# Altium PCB Main-PCB.PcbDoc
Units mm, origin at the board's own origin, x right, y up, seen from the top; angles counter-clockwise.
Board outline 38.4 x 38.83 mm, 2 copper layers (Top Layer, Bottom Layer); 33 components, 27 nets, 163 pads, 42 vias.
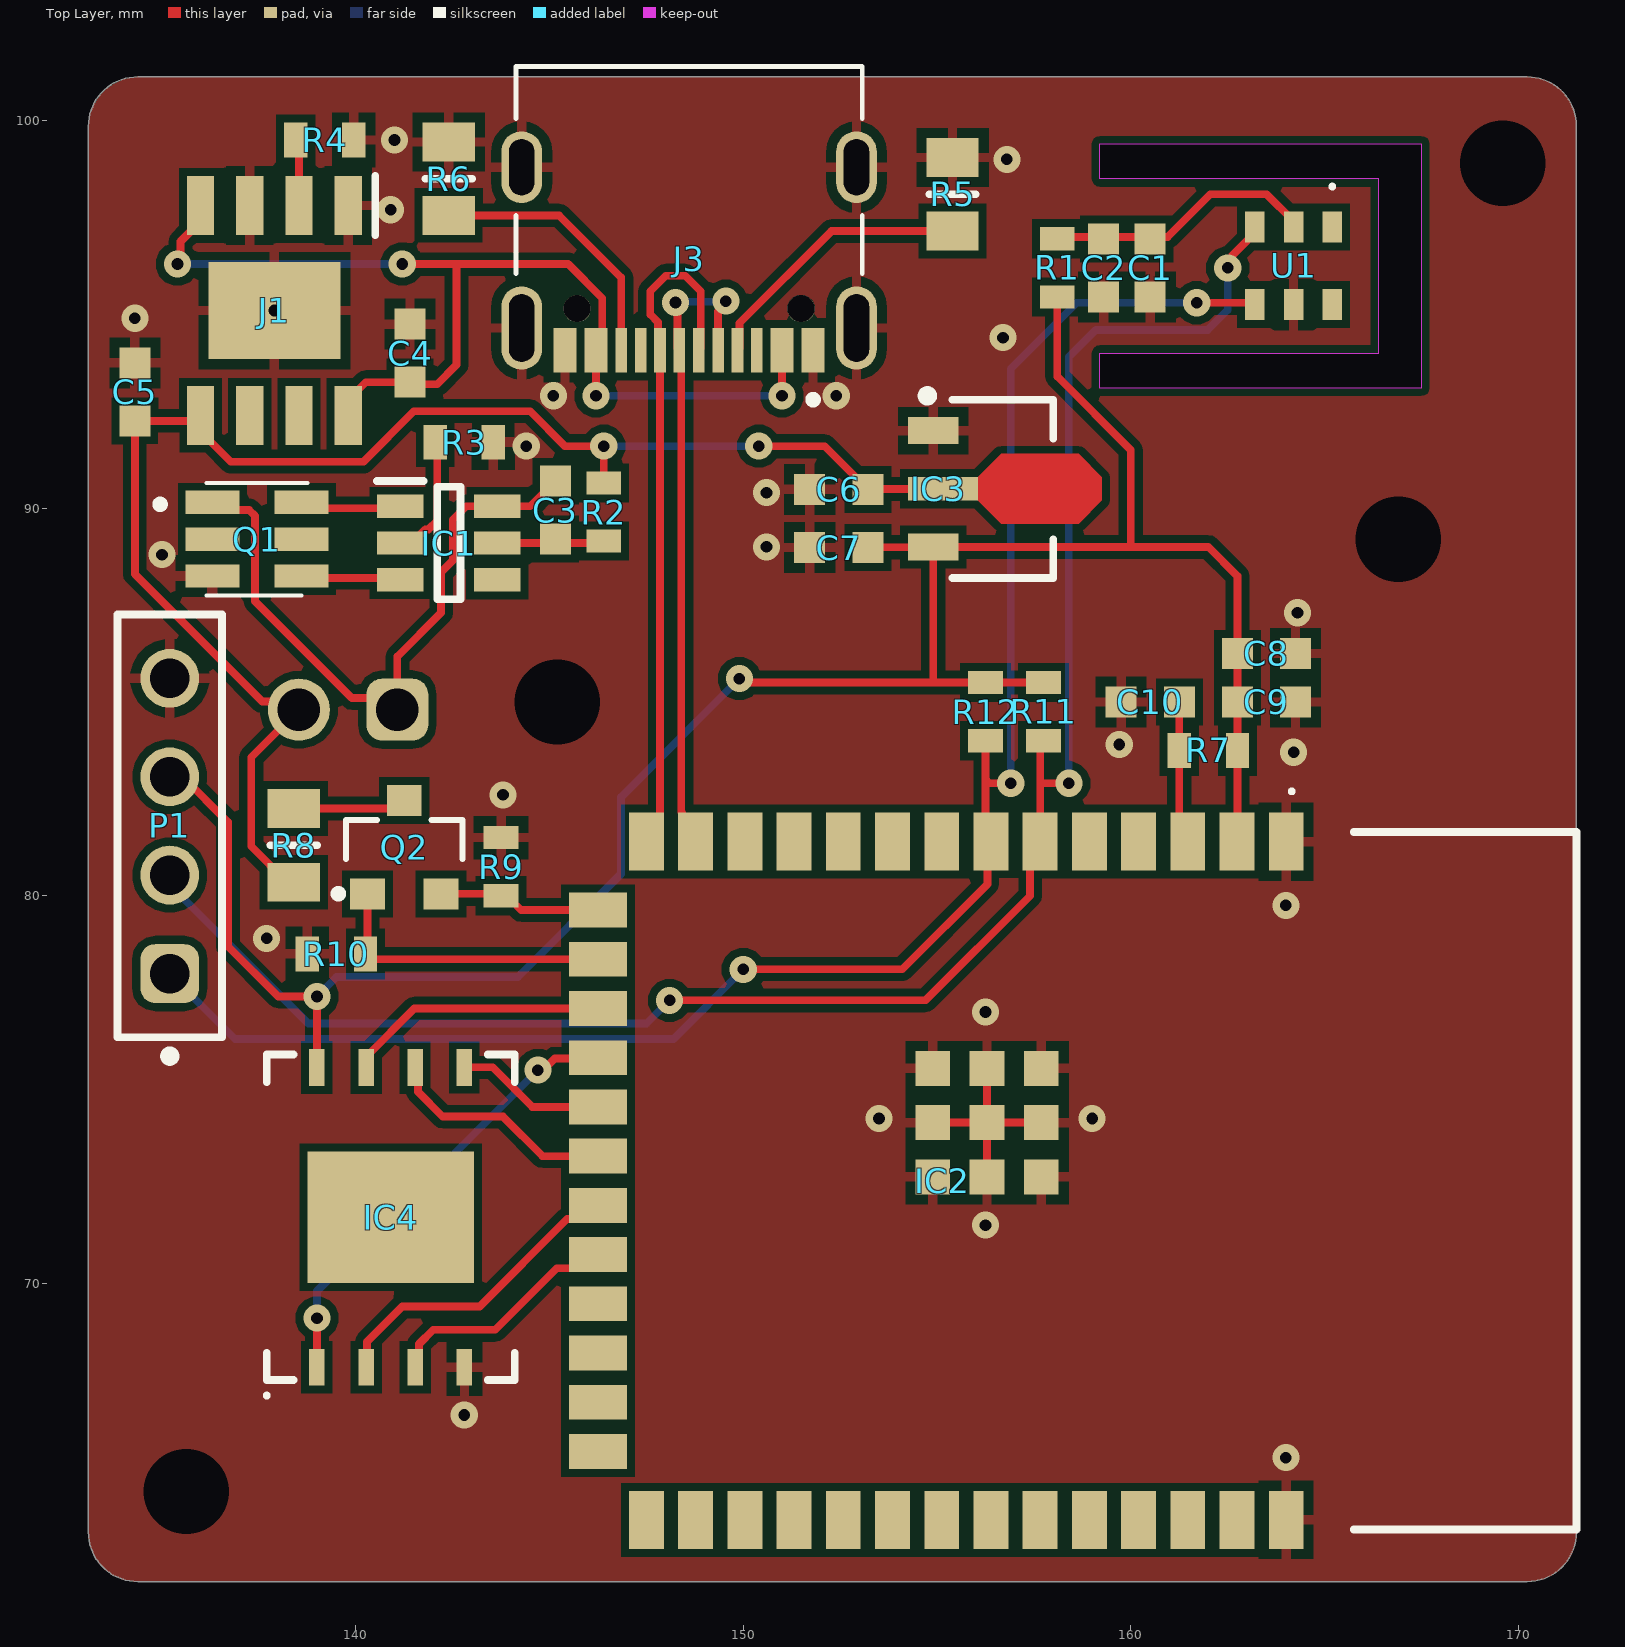
[diagram p0: Top Layer view]
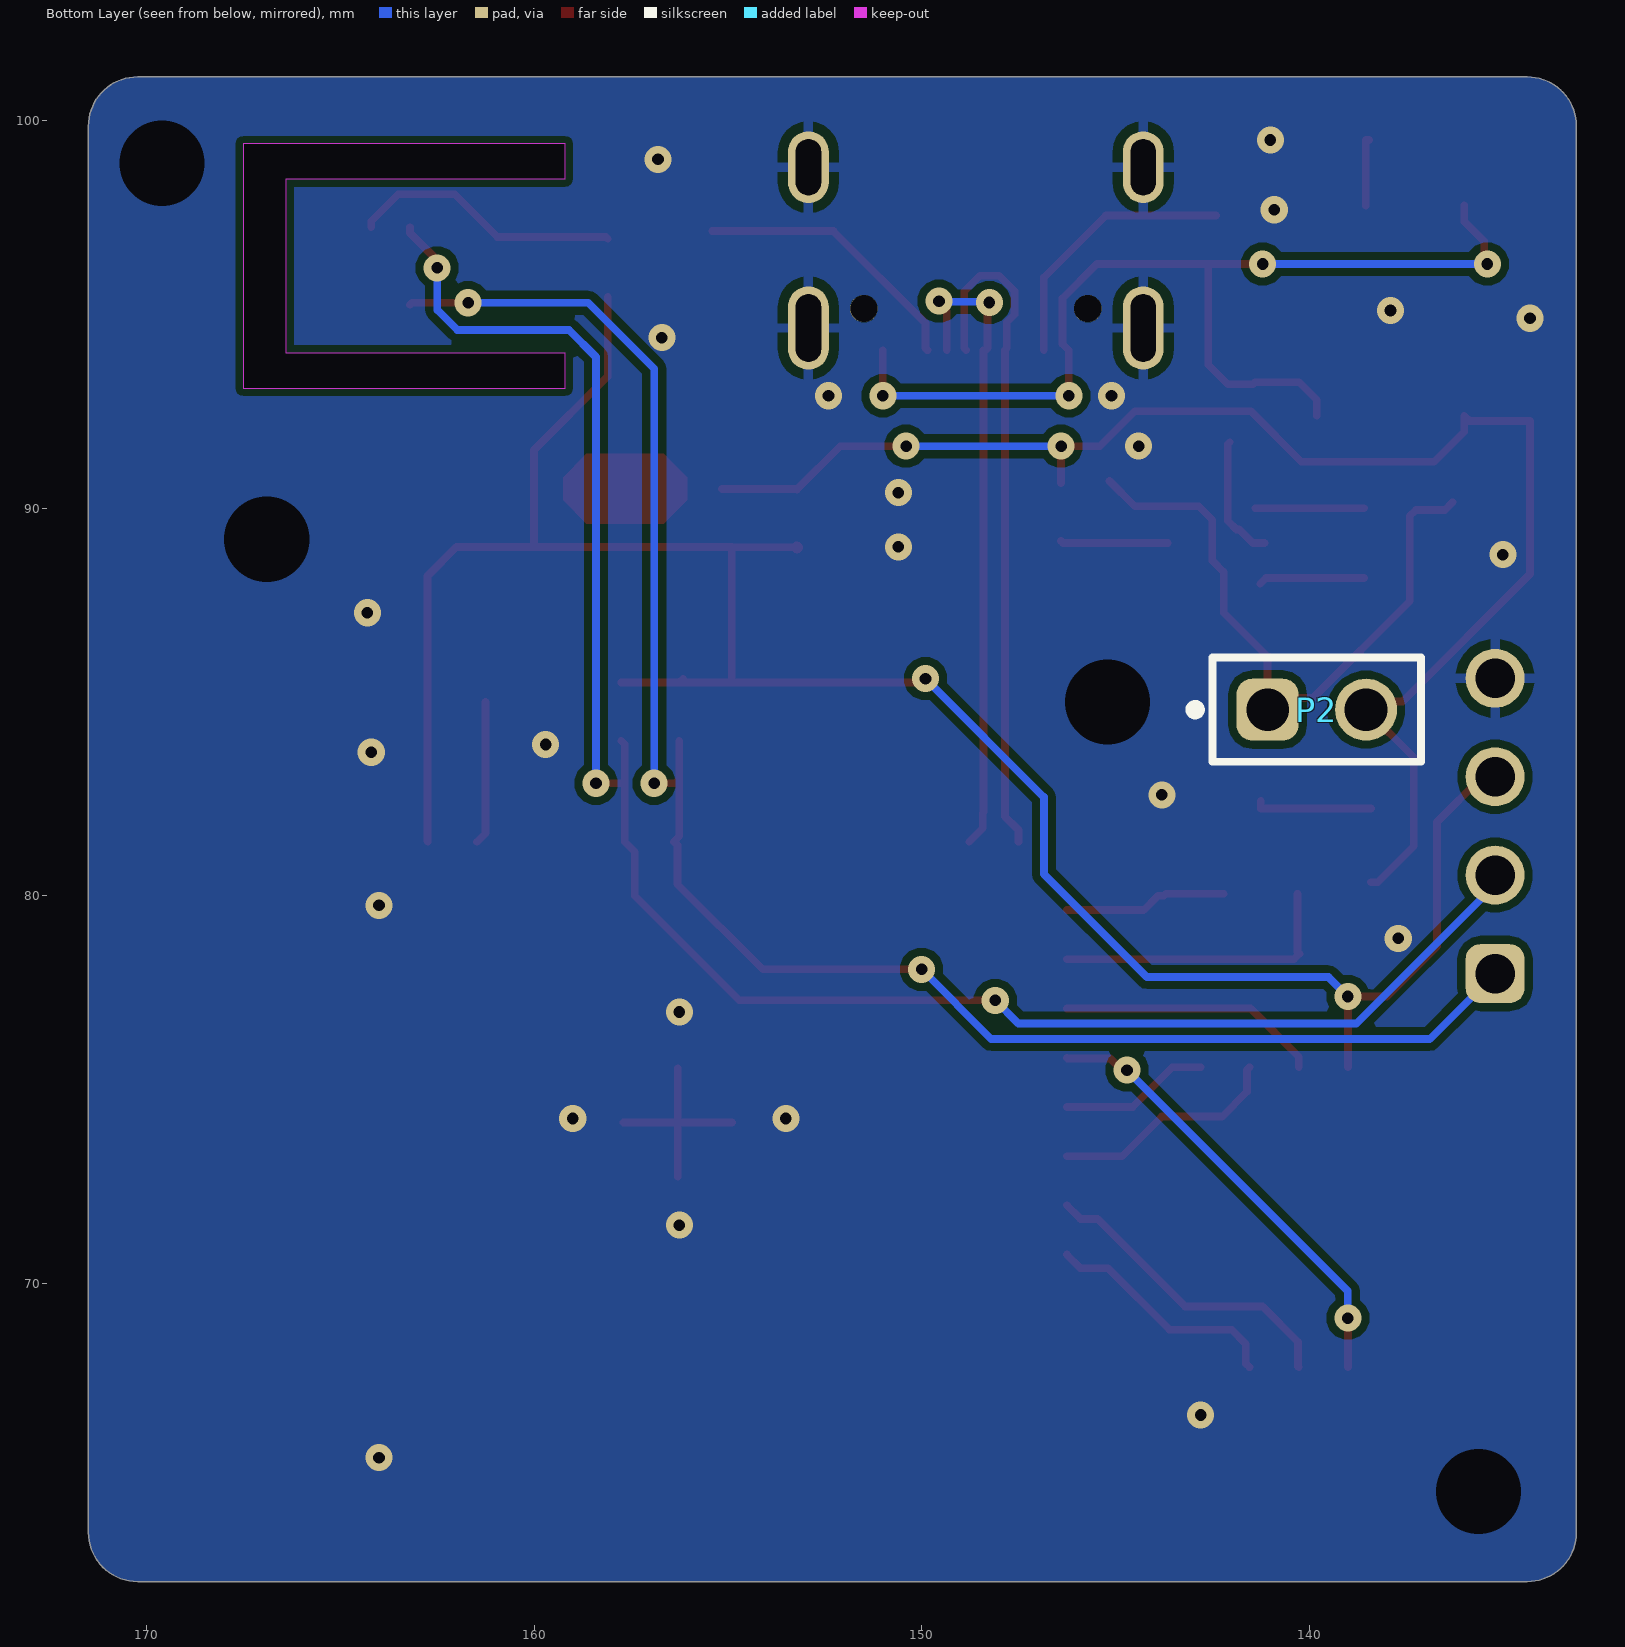
[diagram p1: Bottom Layer view, seen from below]

## Layer stack, top to bottom
Top Solder: solder mask 0.0102, Solder Resist, Dk 3.5
Top Layer: signal copper 0.0356
Dielectric 1: dielectric 0.32, FR-4, Dk 4.8
Bottom Layer: signal copper 0.0356
Bottom Solder: solder mask 0.0102, Solder Resist, Dk 3.5

## Board outline
133.1,63.57 133.1,99.86 cw(c134.37,99.86) 134.37,101.13 170.23,101.13 cw(c170.23,99.86) 171.5,99.86 171.5,99.3 171.5,65.523 171.5,63.57 cw(c170.23,63.57) 170.23,62.3 134.37,62.3 cw(c134.37,63.57)
cut-out: 159.2,94 166.4,94 166.4,98.5 159.2,98.5 159.2,99.4 167.5,99.4 167.5,93.1 159.2,93.1

## Design rules (kind name [scope] priority, off if disabled: settings)
Clearance Clearance_1 [All] p1: gap=0.2 ignorepadtopadclearanceinfootprint=TRUE except(0: Arc-Hole Track-Hole SMDPad-Hole THPad-Hole Via-Hole Fill-Hole Poly-Hole Region-Hole Text-Hole Hole-Hole)
Clearance Clearance_1 [OnMid vs OnMid] p2: gap=0.254 ignorepadtopadclearanceinfootprint=FALSE sourcerule=43 cellrowname=All cellrowtype=0 cellcolname=All cellcoltype=0 innerlayers=TRUE
Clearance Clearance_2 [(ExistsOnLayer('Top Layer') Or ExistsOnLayer('Bottom Layer')) vs (ExistsOnLayer('Top Layer') Or ExistsOnLayer('Bottom Layer'))] p3: gap=0.254 ignorepadtopadclearanceinfootprint=FALSE sourcerule=43 cellrowname=All cellrowtype=0 cellcolname=All cellcoltype=0 outerlayers=TRUE
Clearance [All] p4: gap=0.254 ignorepadtopadclearanceinfootprint=FALSE ismatrix=TRUE
MinimumSolderMaskSliver [All] p1: minsoldermaskwidth=0.05
PolygonConnect PolygonConnectStyle_1 [IsVia] p1: connectstyle=Direct reliefconductorwidth=0.254 reliefentries=2 polygonreliefangle="0 Angle" airgapwidth=0.254
PolygonConnect [All] p2: connectstyle=Relief reliefconductorwidth=0.254 reliefentries=4 polygonreliefangle="90 Angle" airgapwidth=0.254
RoutingVias RoutingViaStyle_1 [All] p1: holewidth=0.3 width=0.7 viastyle="Through Hole" minholewidth=0.3 minwidth=0.7 maxholewidth=0.711 maxwidth=1.27
SilkToSilkClearance [All] p1: silktosilkclearance=0.15
SilkToSolderMaskClearance [IsPad] p1: minsilkscreentomaskgap=0.1 clearancetoexposedcopper=TRUE
SolderMaskExpansion SolderMaskExpansion_1 [IsVia] p1: expansion=0.102 istentingtop=TRUE useseparateexpansions=TRUE expansionbottom=0.102 istentingbottom=TRUE
SolderMaskExpansion [All] p2: expansion=0.1 istentingtop=FALSE
SupplyNets "Schematic Supply Nets_3" [InNet('+3V')] p1: voltage=0.000
SupplyNets "Schematic Supply Nets_2" [InNet('B+')] p2: voltage=0.000
SupplyNets "Schematic Supply Nets_1" [InNet('+VBUS')] p3: voltage=0.000
SupplyNets "Schematic Supply Nets" [InNet('GND')] p4: voltage=0.000
Width MaxMinWidth_1 [All] p1: maxlimit=0.3 minlimit=0.15 preferedwidth=0.2 minimp=50.000000 maximp=50.000000 favimp=50.000000
27 further rules are at their usual default settings.

## Classes and differential pairs
component class U_USB: J3 qg R5 R6
component class U_NAND_Flash: IC4 qg
component class U_LDO: C6 C7 IC3 qg
component class U_ESP32_S2_SOLO_2: C8 C9 C10 IC2 P1 P? Q2 qg R7 R8 R9 R10
component class U_Battery_Management: C3 C4 C5 IC1 J1 P2 Q1 qg R2 R3 R4
component class U_AHT20_Sensor: C1 C2 qg R1 U1
component class Top_Design: qg R11 R12

## Components (designator, comment, footprint, x,y, rotation, side; value= is the part's Value field where it differs from the comment)
C1 "Generic Capacitor 10uF 0603" "Wurth 0603 capacitor" 160.5,96.2 r90 top value=10uF
C2 "Generic Capacitor 100nF 0603" "Wurth 0603 capacitor" 159.3,96.2 r90 top value=100nF
C3 "Generic Capacitor 100nF 0603" "Wurth 0603 capacitor" 145.15,89.95 r270 top value=100nF
C4 "Generic Capacitor 10uF 0603" "Wurth 0603 capacitor" 141.4,94 r270 top value=10uF
C5 "Generic Capacitor 10uF 0603" "Wurth 0603 capacitor" 134.3,93 r270 top value=10uF
C6 "Generic Capacitor 10uF 0603" "Wurth 0603 capacitor" 152.463,90.485 r0 top value=10uF
C7 "Generic Capacitor 10uF 0603" "Wurth 0603 capacitor" 152.463,88.985 r0 top value=10uF
C8 "Generic Capacitor 10uF 0603" "Wurth 0603 capacitor" 163.5,86.25 r180 top value=10uF
C9 "Generic Capacitor 100nF 0603" "Wurth 0603 capacitor" 163.5,85 r180 top value=100nF
C10 "Generic Capacitor 1uF 0603" "Wurth 0603 capacitor" 160.5,85 r0 top value=1uF
IC1 "FS312F-G" SOT95P280X145-6N 142.4,89.1 r0 top
IC2 "ESP32-S2-SOLO-2" "ESPRESSIF ESP32S2SOLO2" 158.75,72.644 r270 top
IC3 "HT7130-1" "UMW SOT89-3" 156.75,90.5 r0 top
IC4 "HYF1GQ4UDACAE" "HeYangTek WSON-8-EP" 140.9,71.7 r90 top
J1 "TP4056" SOIC127P600X175-9N 137.9,95.1 r270 top
J3 "KH-TYPE-C-16P" KINGHELM_KH-TYPE-C-16P 148.6,98.8 r180 top
P1 "OLED header" "4x1 2.54mm F" 135.2,81.8 r90 top
P2 "Battery connection" "2x1 2.54mm" 139.8,84.8 r180 bottom
Q1 "FS8205" FS8205 136.8,89.2 r0 top
Q2 "SI2310B-TP" "MCC SOT-23-3" 141.25,81.25 r90 top
R1 "Generic Resistor 330R 0603" "Wurth 0603 Resistor" 158.1,96.2 r90 top value=330R
R2 "Generic Resistor 100R 0603" "Wurth 0603 Resistor" 146.4,89.9 r90 top value=100R
R3 "Generic Resistor 1k 0603" "Wurth 0603 Resistor" 142.8,91.7 r180 top value=1k
R4 "Generic Resistor 2k 0603" "Wurth 0603 Resistor" 139.2,99.5 r180 top value=2k
R5 "Generic Resistor 5k1 0805" "0805 Resistor" 155.4,98.1 r270 top value=5k1
R6 "Generic Resistor 5k1 0805" "0805 Resistor" 142.4,98.5 r270 top value=5k1
R7 "Generic Resistor 10k 0603" "Wurth 0603 Resistor" 162,83.75 r0 top value=10k
R8 "Generic Resistor 5k1 0805" "0805 Resistor" 138.4,81.3 r270 top value=5k1
R9 "Generic Resistor 2k2 0603" "Wurth 0603 Resistor" 143.75,80.75 r270 top value=2k2
R10 "Generic Resistor 10k 0603" "Wurth 0603 Resistor" 139.5,78.5 r0 top value=10k
R11 "Generic Resistor 2k2 0603" "Wurth 0603 Resistor" 157.75,84.75 r90 top value=2k2
R12 "Generic Resistor 2k2 0603" "Wurth 0603 Resistor" 156.25,84.75 r90 top value=2k2
U1 "AHT20" AHT20 164.2,96.25 r270 top

## Footprints (in the part's own frame and the unit in brackets; to place one, negate y for a bottom-side part, rotate by r counter-clockwise, add the part's x,y. Pads: shape width x height; smd on the part's side, far side on the other; paste and mask are expansions set on the pad)
"2x1 2.54mm" [mm] "Pin Header, pitch 2.54 mm, THT, Vertical, single row, 2p"
  rrect50% 1.6x1.6 hole 1.1: 1(-1.27,0)
  round 1.6 hole 1.1: 2(1.27,0)
  silkscreen extent -3.26,-1.35 2.69,1.35, body extent -2.54,-1.27 2.54,1.27, height 8.57
"4x1 2.54mm F" [mm] "Socket Header, Pitch 2.54 mm, THT, Vertical, single row, 4p"
  rrect50% 1.52x1.52 hole 1.02: 1(-3.81,0)
  round 1.52 hole 1.02: 2(-1.27,0) 3(1.27,0) 4(3.81,0)
  silkscreen extent -6.06,-1.35 5.46,1.35, body extent -5.33,-1.25 5.33,1.25, height 8.55
"0805 Resistor" [mm]
  rect 1x1.35 smd paste-0.045 mask+0.1: 1(-0.95,0) 2(0.95,0)
  silkscreen extent 0,-0.6 0,0.6, body extent -1,-0.63 1,0.63, height 0.52
AHT20 [mm]
  rect 0.8x0.5 smd: 1(-1,1) 2(-1,0) 3(-1,-1) 4(1,-1) 5(1,0) 6(1,1)
  silkscreen extent -2.1,0.95 -2,1.05, body extent -1.5,-1.5 1.5,1.5, height 1.2
"ESPRESSIF ESP32S2SOLO2" [mm]
  rect 1.5x0.9 smd: 1(-8.75,5.26) 2(-8.75,3.99) 3(-8.75,2.72) 4(-8.75,1.45) 5(-8.75,0.18) 6(-8.75,-1.09) 7(-8.75,-2.36) 8(-8.75,-3.63) 9(-8.75,-4.9) 10(-8.75,-6.17) 11(-8.75,-7.44) 12(-8.75,-8.71) 13(-8.75,-9.98) 14(-8.75,-11.25) 27(8.75,-11.25) 28(8.75,-9.98) 29(8.75,-8.71) 30(8.75,-7.44) 31(8.75,-6.17) 32(8.75,-4.9) 33(8.75,-3.63) 34(8.75,-2.36) 35(8.75,-1.09) 36(8.75,0.18) 37(8.75,1.45) 38(8.75,2.72) 39(8.75,3.99) 40(8.75,5.26)
  rect 0.9x1.5 smd: 15(-6.985,-12.5) 16(-5.715,-12.5) 17(-4.445,-12.5) 18(-3.175,-12.5) 19(-1.905,-12.5) 20(-0.635,-12.5) 21(0.635,-12.5) 22(1.905,-12.5) 23(3.175,-12.5) 24(4.445,-12.5) 25(5.715,-12.5) 26(6.985,-12.5)
  rect 0.9x0.9 smd: 41(-1.5,-2.46) 42(-1.5,-1.06) 43(-2.9,-1.06) 44(-2.9,-2.46) 45(-2.9,-3.86) 46(-1.5,-3.86) 47(-0.1,-3.86) 48(-0.1,-2.46) 49(-0.1,-1.06)
  silkscreen extent -10.1,5.35 9,12.75, body extent -9,-12.75 9,12.75, height 3.1
FS8205 [mm]
  rect 1.4x0.6 smd: 1(-0.5,0.95) 2(-0.5,0) 3(-0.5,-0.95) 4(1.8,0.95) 5(1.8,0) 6(1.8,-0.95)
  silkscreen extent -1.95,-1.45 1.95,1.45, body extent -0.79,-1.45 2.01,1.45, height 1.46
"HeYangTek WSON-8-EP" [mm] "SON, 8-Leads, Body 6,00x8,00mm, Pitch 1,27mm, Thermal Pad 4,30x3,40mm, IPC Medium Density"
  rect 0.95x0.4 smd: 1(-3.87,1.905) 2(-3.87,0.635) 3(-3.87,-0.635) 4(-3.87,-1.905) 5(3.87,-1.905) 6(3.87,-0.635) 7(3.87,0.635) 8(3.87,1.905)
  rect 3.4x4.3 smd paste-1.7: 9(0,0)
  silkscreen extent -4.65,-3.2 4.2,3.25, body extent -4.05,-3.05 4.05,3.05, height 0.9
KINGHELM_KH-TYPE-C-16P [mm]
  rect 0.6x1.15 smd mask+0.05: A1_B12(-3.2,4.725) A4_B9(-2.4,4.725) A9_B4(2.4,4.725) A12_B1(3.2,4.725)
  rect 0.3x1.15 smd mask+0.05: A5(-1.25,4.725) A6(-0.25,4.725) A7(0.25,4.725) A8(1.25,4.725) B5(1.75,4.725) B6(0.75,4.725) B7(-0.75,4.725) B8(-1.75,4.725)
  oval 1.05x1.85 hole 0.65 slot 1.45 at 90 deg mask+0.05: SH1(-4.32,0) SH2(4.32,0)
  oval 1.05x2.15 hole 0.65 slot 1.75 at 90 deg mask+0.05: SH3(-4.32,4.15) SH4(4.32,4.15)
  round 0.7 hole 0.7 unplated: ""(-2.89,3.65) ""(2.89,3.65)
  silkscreen extent -4.47,-2.6 4.47,6.1, body extent -4.47,-2.6 4.47,5.3, height 3.22
"MCC SOT-23-3" [mm]
  rect 0.8x0.9 smd: 1(-1.2,0.95) 2(-1.2,-0.95) 3(1.2,0)
  silkscreen extent -1.3,-1.5 0.7,1.8, body extent -1.42,-1.5 1.42,1.5, height 1.2
SOIC127P600X175-9N [mm]
  rect 1.525x0.7 smd: 1(-2.712,1.905) 2(-2.712,0.635) 3(-2.712,-0.635) 4(-2.712,-1.905) 5(2.712,-1.905) 6(2.712,-0.635) 7(2.712,0.635) 8(2.712,1.905)
  rect 2.513x3.402 smd: 9(0,0)
  silkscreen extent -3.47,2.61 -1.95,2.61, body extent -3,-2.45 3,2.45, height 1.75
SOT95P280X145-6N [mm]
  rect 1.2x0.6 smd: 1(-1.25,0.95) 2(-1.25,0) 3(-1.25,-0.95) 4(1.25,-0.95) 5(1.25,0) 6(1.25,0.95)
  silkscreen extent -1.85,-1.45 0.3,1.6, body extent -1.4,-1.45 1.4,1.45, height 1.45
"UMW SOT89-3" [mm] "SOT89, 3-Leads, Body 4,50x2,45mm, Pitch 1,50mm, Lead Span 4,1mm, IPC Medium Density"
  rect 1.3x0.7 smd: 1(-1.85,1.5) 3(-1.85,-1.5)
  rect 1.8x0.6 smd: 2(-1.6,0)
  Top Layer region: -0.7,0.3 -0.1,0.9 1.9,0.9 2.5,0.3 2.5,-0.3 1.9,-0.9 -0.1,-0.9 -0.7,-0.3
  silkscreen extent -2.12,-2.3 1.25,2.52, body extent -1.35,-2.3 1.25,2.3, height 1.6
"Wurth 0603 capacitor" [mm] "Ceramic Capacitors, body 1.6x0.8mm"
  rect 0.8x0.8 smd: 1(-0.75,0) 2(0.75,0)
  body extent -0.8,-0.4 0.8,0.4, height 0.8
"Wurth 0603 Resistor" [mm] "Fixed Thick Film, body 1.60 x 0.80 mm"
  rect 0.6x0.9 smd paste-0.028 mask+0.1: 1(-0.75,0) 2(0.75,0)
  body extent -0.8,-0.4 0.8,0.4, height 0.45

## Part data
IC1: "Integrated Circuit", Manufacturer_Name="Fortune Semiconductor Corporation", Datasheet Link=https://www.ic-fortune.com/upload/Download/FS312F-G-DS-12_EN.pdf, Height=1.45mm, Manufacturer_Part_Number=FS312F-G
IC2: library part "Espressif ESP32-S2-SOLO-2", "Integrated Circuit"
IC3: library part "UMW HT7130-1", "HOLTEK   HT7130-1-SOT89TRLF   Fixed LDO Voltage Regulator, 4V to 24V, 100mV Dropout, 3Vout, 30mAout, SOT-89-3", Manufacturer=Holtek, Manufacturer Part Number=HT7130-1-SOT89TRLF, Supplier Part Number=53M7841, Category="Voltage Regulators - Linear", ComponentLink1Description=https://datasheet.ciiva.com/1511/79203-1511505.pdf?src-supplier=Element14, ComponentLink1URL=https://datasheet.ciiva.com/1511/79203-1511505.pdf?src-supplier=Element14, Pricing="1=0,143, 10=0,143, 25=0,143, 50=0,143, 100=0,143, 250=0,143, 500=0,143, 1000=0,143 (USD)", RoHS=Yes, Stock=2, Supplier=Newark
IC4: library part "HeYangTek HYF1GQ4UDACAE"
J1: "Connector", Manufacturer_Name="NanJing Top Power", Datasheet Link=https://dlnmh9ip6v2uc.cloudfront.net/datasheets/Prototyping/TP4056.pdf, Height=1.75mm, Manufacturer_Part_Number=TP4056
J3: Package=None, Availability="Not in stock", Check_prices=https://www.snapeda.com/parts/KH-TYPE-C-16P/Ki/view-part/?ref=eda, MF=kinghelm, MP=KH-TYPE-C-16P, Price=None, SnapEDA_Link=https://www.snapeda.com/parts/KH-TYPE-C-16P/Ki/view-part/?ref=snap
P1: library part 4P, "WR-PHD Pin Header, THT, Vertical, pitch 2.54mm, 1 Row, 4P", Contact Resistance=20mOhm, Manufacturer="Wurth Elektronik", Manufacturer Part Number=61300411121, Operating Temperature Max=105°C, Operating Temperature Min=-40°C, Rated Current=3A, Withstanding Voltage=500V, Working Voltage=250V, Category="Board-to-Board Connectors", ComponentLink1Description="Website Link", ComponentLink1URL=https://www.we-online.com/redexpert/article/61300411121?ad, ComponentLink2Description="Datasheet Link", ComponentLink2URL=https://www.we-online.com/redexpert/spec/61300411121?ad, Gender="Pin Header", Match Code=WR-PHD, Mount="Through Hole", Number of Pins=4, Number of Rows=1, Orientation=Vertical, Packaging=Bag, Pitch=2.54mm
P2: library part 61300211121, "WR-PHD Pin Header, THT, Vertical, pitch 2.54mm, 1 Row, 2P", Contact Resistance=20mOhm, Manufacturer="Wurth Elektronik", Operating Temperature Max=105°C, Operating Temperature Min=-40°C, Rated Current=3A, Withstanding Voltage=500V, Working Voltage=250V, Category="Board-to-Board Connectors", ComponentLink1Description="Website Link", ComponentLink1URL=https://www.we-online.com/redexpert/article/61300211121?ad, ComponentLink2Description="Datasheet Link", ComponentLink2URL=https://www.we-online.com/redexpert/spec/61300211121?ad, Gender="Pin Header", Manufacturer Part Number=61300211121, Match Code=WR-PHD, Mount="Through Hole", Number of Pins=2, Number of Rows=1, Orientation=Vertical, Packaging=Bag, Pitch=2.54mm
Q1: "MOSFET (N-Channel)", Manufacturer_Name="Fortune Semiconductor Corporation", Datasheet Link=https://www.ic-fortune.com/upload/Download/FS8205-DS-19_EN.pdf, Height=1mm, Manufacturer_Part_Number=FS8205
Q2: library part "MCC SI2310B-TP", "Power Field-Effect Transistor", Manufacturer=MCC, Supplier Part Number=353-SI2310B-TPCT-ND, Manufacturer Part Number=SI2310B-TP, Pricing="1=0,36, 10=0,255, 100=0,1286, 500=0,10488, 1000=0,07782 (USD)", RoHS=Yes, Stock=114263, Supplier=Digikey
U1: "Undefined or Miscellaneous", Manufacturer_Name=Aosong, Datasheet Link=http://www.aosong.com/userfiles/files/media/Data%20Sheet%20AHT20.pdf, Height=1.1mm, Manufacturer_Part_Number=AHT20

## Free pads (board coordinates)
  round 0 hole 2.2 unplated mask+0: 4(135.628,64.624) 4(145.2,85) 4(166.9,89.2) 4(169.6,98.9)

## Via types
v1: diameter 0.7, hole 0.3, Top Layer to Bottom Layer, tented both sides, 42 vias

## Nets (pads, with @x,y where several pads share a name; then routed paths per layer and width w, separated by ;. In a path a pad name is that pad's centre, name@x,y a point inside that pad or via, vN(x,y) a via of type N, cw(c..) or ccw(c..) an arc to the next point about the centre after c; other vN are vias at no path point)
+3V: C7.2 C8.2 C9.2 IC2.2 IC3.3 IC4.8 P1.3 R1.1 R7.2 R11.2 R12.2 | length 60.6
  Top Layer w0.2: P1.3 135.53,83.07 136.7,81.9 136.7,78.7 138,77.4 v1(139,77.4) 138.997,77.398 138.997,75.847 138.995,75.845 IC4.8 ; v1(149.9,85.6) 149.996,85.504 150.263,85.504 150.267,85.5 R12.2 ; C7.2@153.221,88.992 IC3.3@154.8,88.992 ; 154.9,85.6 IC3.3 160,89 ; R12.2@156.15,85.6 R12.2 ; R11.2 R12.2 ; R1.1 158.1,93.4 160,91.5 160,89 ; IC2.2 162.75,81.404 R7.2 C9.2 C8.2 162.75,88.25 162,89 160,89
  Top Layer w0.3: C7.2 C7.2@153.221,88.992
  Bottom Layer w0.2: v1(139,77.4) 139.5,77.9 144.183,77.9 146.844,80.561 146.844,82.544 v1(149.9,85.6)
+VBUS: C4.2 J1.4 J1.8 J3.A4_B9 J3.A9_B4 | length 27.9
  Top Layer w0.2: v1(135.4,96.3) 135.477,96.377 135.477,96.881 135.995,97.4 J1.4 ; J1.8 139.805,92.8 140.254,93.25 C4.2 141.45,93.2 142.1,93.2 142.6,93.7 142.6,96.3 ; v1(141.2,96.3) 142.6,96.3 ; v1(146.2,92.9) J3.A9_B4 146.36,94.235 146.36,95.419 145.479,96.3 142.6,96.3 ; v1(151,92.9) J3.A4_B9
  Bottom Layer w0.2: v1(135.4,96.3) v1(141.2,96.3) ; v1(146.2,92.9) v1(151,92.9)
ADC_SW: IC2.16 Q2.1 R10.2 | length 7.6
  Top Layer w0.2: Q2.1 140.3,78.55 R10.2 140.391,78.359 IC2.16
B+: C5.2 C6.2 IC3.2 J1.5 P2.2 R2.2 R8.2 | length 39.4
  Top Layer w0.2: R8.2 138.225,80.35 137.3,81.275 137.3,83.57 P2.2 ; P2.2@138.53,84.77 P2.2 ; R2.2 v1(146.4,91.6) 145.4,91.6 144.5,92.5 141.5,92.5 140.2,91.2 136.771,91.2 135.995,91.976 J1.5 135.857,92.25 C5.2 134.3,88.3 137.587,85.013 138.042,85.013 138.255,84.8 P2.2 ; v1(150.4,91.6) 152.098,91.6 C6.2 153.221,90.492 155.142,90.492 IC3.2
  Top Layer w0.3: P2.2@138.255,84.8 P2.2
  Bottom Layer w0.2: v1(146.4,91.6) v1(150.4,91.6)
B-: C3.1 IC1.6 P2.1 Q1.1 | length 16.8
  Top Layer w0.2: Q1.1 136.5,89.95 137.25,89.95 137.4,89.8 137.4,87.6 139.9,85.1 140.77,85.1 P2.1 141.07,86.17 142.2,87.3 142.2,88.35 142.5,88.65 142.5,89.7 142.85,90.05 IC1.6 144.5,90.05 C3.1
BAT_V: IC2.15 Q2.2 R9.2 | length 4.2
  Top Layer w0.2: Q2.2 143.7,80.05 R9.2 143.9,80 144.271,79.629 IC2.15
D_N: IC2.13 J3.A7 J3.B7 | length 16.8
  Top Layer w0.2: v1(148.25,95.307) 148.3,95.257 148.3,94.125 J3.A7 ; J3.A7@148.4,94.075 148.4,82.161 148.42,82.141 148.42,81.744 IC2.13 ; J3.B7 149.35,95.076 149.55,95.276 v1(149.55,95.343)
  Bottom Layer w0.2: v1(148.25,95.307) 148.268,95.325 149.532,95.325 v1(149.55,95.343)
D_P: IC2.14 J3.A6 J3.B6 | length 17.6
  Top Layer w0.2: IC2.14 147.5,81.694 147.85,82.044 J3.B6 147.8,94.125 147.8,94.8 147.6,95 147.6,95.6 148,96 148.5,96 148.9,95.6 148.9,94.667 148.9,94.125 J3.A6
GND: C1.1 C2.1 C4.1 C5.1 C6.1 C7.1 C8.1 C9.1 C10.1 IC2.1 IC2.40 IC2.41 IC2.42 IC2.43 IC2.44 IC2.45 IC2.46 IC2.47 IC2.48 IC2.49 IC3.1 IC4.4 J1.1 J1.3 J1.9 J3.A1_B12 J3.A12_B1 J3.SH1 J3.SH2 J3.SH3 J3.SH4 P1.4 pad.4 Q1.3 R3.1 R4.1 R5.1 R6.1 R9.1 R10.1 U1.5 | length 5.6
  Top Layer w0.2: IC2.46 IC2.41 ; IC2.48 IC2.41 ; IC2.44 IC2.41 ; IC2.42 IC2.41
  other v1: 164,65.5 142.8,66.6 156.25,71.5 153.5,74.25 159,74.25 156.25,77 137.7,78.9 164,79.75 143.8,82.6 164.2,83.7 159.7,83.9 164.3,87.3 135,88.8 150.6,89 150.6,90.4 144.4,91.6 145.1,92.9 152.4,92.9 156.7,94.4 134.3,94.9 137.9,95.1 140.9,97.7 156.8,99 141,99.5
NetC1_2: C1.2 C2.2 R1.2 U1.2 | length 7
  Top Layer w0.2: R1.2 158.15,97 159.3,97 159.7,97 160.95,97 162.05,98.1 163.5,98.1 164.2,97.4 U1.2
NetC3_2: C3.2 IC1.5 R2.1 | length 2.8
  Top Layer w0.2: IC1.5 146.35,89.1 R2.1
NetIC1_1: IC1.1 Q1.4 | length 2.8
  Top Layer w0.2: Q1.4@138.579,90 IC1.1@141.386,90
NetIC1_2: IC1.2 R3.2 | length 3.2
  Top Layer w0.2: IC1.2 141.45,89.1 141.8,89.45 141.874,89.45 142.1,89.676 142.1,91.65 R3.2
NetIC1_3: IC1.3 Q1.6 | length 2.7
  Top Layer w0.2: Q1.6@138.58,88.2 141.109,88.2 IC1.3@141.259,88.05
NetIC2_17: IC2.17 IC4.7 | length 6.8
  Top Layer w0.2: IC4.7 140.265,75.845 141.509,77.089 IC2.17
NetIC2_18: IC2.18 IC4.1 | length 11.7
  Top Layer w0.2: IC4.1 138.997,67.832 138.997,69.097 v1(139,69.1) ; v1(144.7,75.5) 144.835,75.5 145.135,75.8 146.231,75.8 IC2.18
  Bottom Layer w0.2: v1(139,69.1) 139,69.8 v1(144.7,75.5)
NetIC2_19: IC2.19 IC4.5 | length 3.9
  Top Layer w0.2: IC4.5 143.53,75.57 144.551,74.549 IC2.19
NetIC2_20: IC2.20 IC4.6 | length 6
  Top Layer w0.2: IC4.6 141.605,75.5 141.605,74.94 142.245,74.3 143.8,74.3 144.821,73.279 IC2.20
NetIC2_21: IC2.21 IC4.2 | length 8.1
  Top Layer w0.2: IC4.2 140.288,67.853 140.288,68.488 141.2,69.4 143.2,69.4 145.459,71.659 145.9,71.659 IC2.21
NetIC2_22: IC2.22 IC4.3 | length 6.2
  Top Layer w0.2: IC4.3 141.632,67.927 141.632,68.432 142,68.8 143.6,68.8 145.189,70.389 145.9,70.389 IC2.22
NetJ1_2: J1.2 R4.2 | length 1.8
  Top Layer w0.2: R4.2 138.535,99.5 J1.2
NetJ3_A5: J3.A5 R5.2 | length 7.2
  Top Layer w0.2: J3.A5 149.9,94.125 149.9,94.774 152.276,97.15 R5.2
NetJ3_B5: J3.B5 R6.2 | length 7
  Top Layer w0.2: R6.2 145.25,97.55 146.85,95.95 J3.B5
NetQ2_3: Q2.3 R8.1 | length 3
  Top Layer w0.2: R8.1 141.25,82.25 Q2.3
RST: C10.2 IC2.3 R7.1 | length 3.7
  Top Layer w0.2: C10.2 R7.1 161.25,81.614 IC2.3
SCL: IC2.6 P1.2 R11.1 U1.3 | length 48.2
  Top Layer w0.2: v1(148.1,77.3) 154.7,77.3 157.4,80 157.4,81.134 IC2.6 157.66,82.9 ; R11.1 157.66,83.91 157.66,82.9 ; v1(158.4,82.9) 157.66,82.9 ; v1(162.5,96.2) 162.596,96.296 162.596,96.496 163.2,97.1 U1.3
  Bottom Layer w0.2: P1.2 135.2,80.281 138.781,76.7 147.5,76.7 v1(148.1,77.3) ; v1(158.4,82.9) 158.4,93.9 159.1,94.6 161.983,94.6 162.5,95.117 v1(162.5,96.2)
SDA: IC2.7 P1.1 R12.1 U1.4 | length 45.7
  Top Layer w0.2: v1(150,78.1) 154.1,78.1 156.3,80.3 156.3,81.304 IC2.7 156.25,81.534 156.25,83 ; R12.1 156.25,83 ; v1(156.9,82.9) 156.35,82.9 156.25,83 ; v1(161.7,95.3) 163.15,95.3 U1.4
  Bottom Layer w0.2: P1.1 136.89,76.3 148.2,76.3 v1(150,78.1) ; v1(156.9,82.9) 156.9,93.6 158.6,95.3 v1(161.7,95.3)
pads on no net: IC1.4 IC2.4 IC2.5 IC2.8 IC2.9 IC2.10 IC2.11 IC2.12 IC2.23 IC2.24 IC2.25 IC2.26 IC2.27 IC2.28 IC2.29 IC2.30 IC2.31 IC2.32 IC2.33 IC2.34 IC2.35 IC2.36 IC2.37 IC2.38 IC2.39 IC4.9 J1.6 J1.7 J3. J3.A8 J3.B8 Q1.2 Q1.5 U1.1 U1.6

## Polygon pours and split planes (outlines as drawn)
GND on Bottom Layer "GND_L02_P001" (solid, pour order 1): 134.37,62.3 170.23,62.3 ccw(c170.23,63.57) 171.5,63.57 171.5,99.86 ccw(c170.23,99.86) 170.23,101.13 134.37,101.13 ccw(c134.37,99.86) 133.1,99.86 133.1,63.57 ccw(c134.37,63.57)
GND on Top Layer "GND_L01_P002" (solid, pour order 2): 134.37,62.3 170.23,62.3 ccw(c170.23,63.57) 171.5,63.57 171.5,99.86 ccw(c170.23,99.86) 170.23,101.13 134.43,101.13 ccw(c134.43,99.8) 133.1,99.8 133.1,63.57 ccw(c134.37,63.57)

## Silkscreen, mask and mechanical layers (free items; w line width, h text height)
Mechanical 1:
  lines w0.15: 133.1,63.57 ccw(c134.37,63.57) 134.37,62.3 136,62.3 141.099,62.3 170.23,62.3 ccw(c170.23,63.57) 171.5,63.57 171.5,65.523 171.5,99.3 171.5,99.86 ccw(c170.23,99.86) 170.23,101.13 169.7,101.13 135.241,101.13 134.37,101.13 ccw(c134.37,99.86) 133.1,99.86 133.1,98.989 133.1,65.2 133.1,63.57 ; 159.2,93.1 167.5,93.1 167.5,99.4 159.2,99.4 159.2,98.5 166.4,98.5 166.4,94 165.5,94 159.2,94 159.2,93.1

## Text inside footprints (layer, text, board x,y; h text height)
J3: Mechanical 13 "PCB EDGE" at 143.1,101.05 h0.81 r180